# EAGLE board HAP-USB-3.0 (EAGLE 4.16)
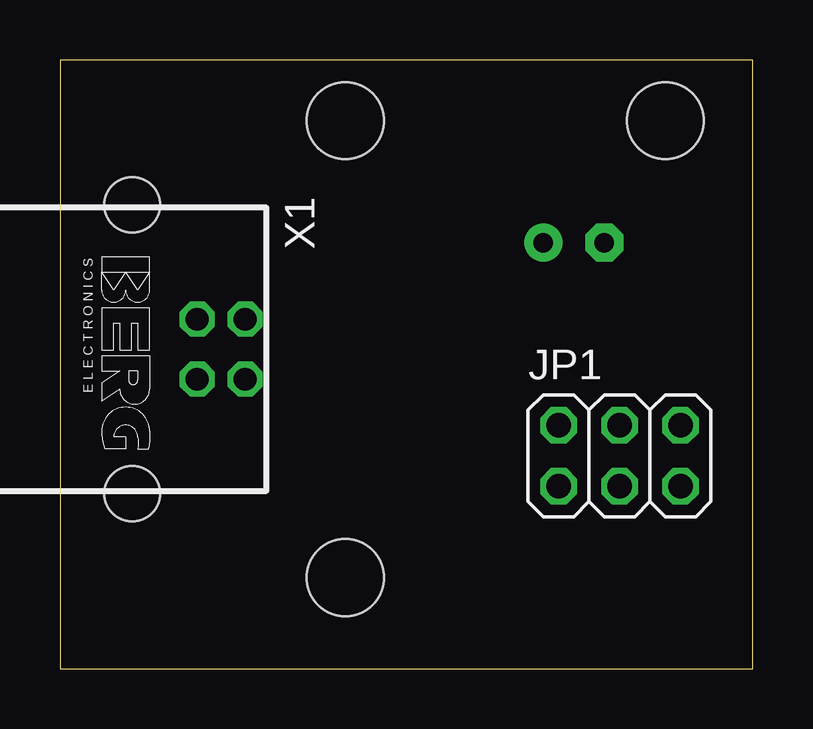
[diagram p0: board, top side]
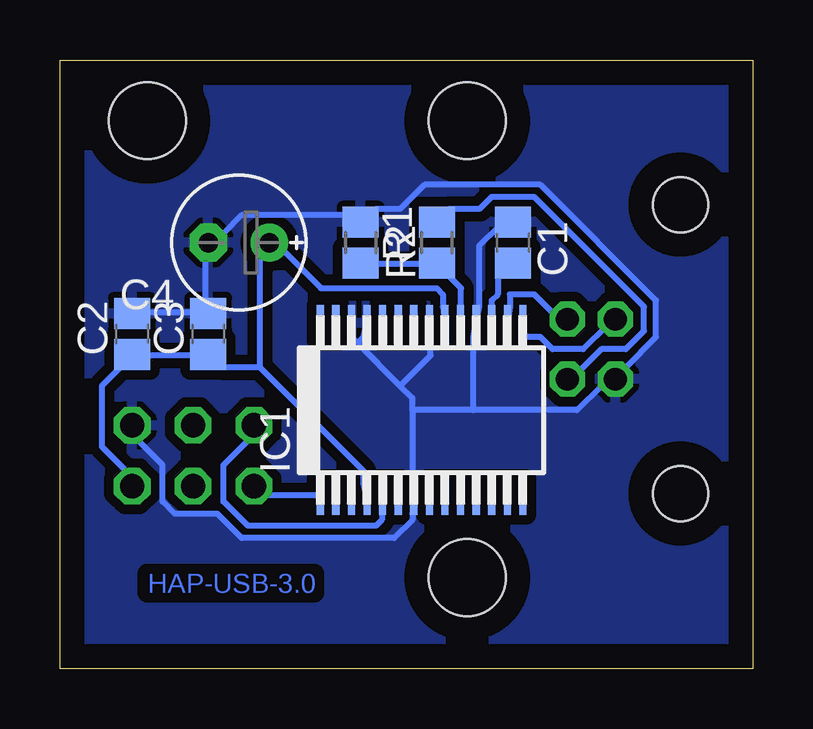
[diagram p1: board, bottom side, seen from below]

Size 28.88 x 25.39 mm. Coordinates in mm from the lower left corner, seen from the top.
Outline: 0,0 28.88,0 28.88,25.39 0,25.39 0,0
Copper layers (1*16): Top 0.035mm / dielectric 1.5mm / Bottom 0.035mm
Design rules "default": minimum track width 10mil, minimum drill 24mil, track to track 8mil, track to pad 8mil, pad to pad 8mil, via to via 8mil, smd to smd 8mil, copper to edge 40mil, drill to drill 8mil, minimum pad ring 10mil, minimum via ring 8mil, stop-mask expansion 4mil, vias tented up to drill 0mil, thermal gap 10mil
Holes 3.2 mm at 11.9,22.85 11.9,3.8 25.23,22.85

## Footprints (pad centres in the part's own frame; a part is rotated, then mirrored left to right if it is on the bottom)
C0805 = smd 1.3 x 1.5: 1 -0.85,0; 2 0.85,0
E2,5-6E = drill 0.813 pad 1.575 round: + -1.27,0 | drill 0.813 pad 1.575 octagon: - 1.27,0
SSOP-28 = smd 0.3 x 1.5: 1 -4.225,-3.625; 2 -3.575,-3.625; 3 -2.925,-3.625; 4 -2.275,-3.625; 5 -1.625,-3.625; 6 -0.975,-3.625; 7 -0.325,-3.625; 8 0.325,-3.625; 9 0.975,-3.625; 10 1.625,-3.625; 11 2.275,-3.625; 12 2.925,-3.625; 13 3.575,-3.625; 14 4.225,-3.625; 15 4.225,3.625; 16 3.575,3.625; 17 2.925,3.625; 18 2.275,3.625; 19 1.625,3.625; 20 0.975,3.625; 21 0.325,3.625; 22 -0.325,3.625; 23 -0.975,3.625; 24 -1.625,3.625; 25 -2.275,3.625; 26 -2.925,3.625; 27 -3.575,3.625; 28 -4.225,3.625
2X03 = drill 1.016 octagon: 1 -2.54,-1.27; 2 -2.54,1.27; 3 0,-1.27; 4 0,1.27; 5 2.54,-1.27; 6 2.54,1.27
R0805 = smd 1.3 x 1.5: 1 -0.85,0; 2 0.85,0
PN61729 = drill 0.95 octagon: 1 1.25,4.71; 2 -1.25,4.71; 3 -1.25,2.71; 4 1.25,2.71 | hole 2.3: -6.02,0; 6.02,0

## Placement (x,y rotation side)
C1  100n  [C0805]  10,17.77 270 bottom
C2  100n  [C0805]  25.87,13.96 90 bottom
C3  100n  [C0805]  22.7,13.96 90 bottom
C4  4µ7  [E2,5-6E]  21.42,17.77 180 bottom
IC1  FT232RL  [SSOP-28]  13.81,10.79 0 bottom
JP1  [2X03]  23.33,8.89 0 top
R1  4k7  [R0805]  13.17,17.77 90 bottom
R2  10k  [R0805]  16.34,17.77 270 bottom
X1  [PN61729]  3.01,13.33 270 top

## Library data of the parts
C1-C4 R1 R2 = rcl
IC1 = ftdi4
JP1 = pinhead
X1 = con-berg

## Nets
GND: C1.1 C2.2 C3.2 C4.- IC1.7 IC1.18 IC1.21 IC1.25 IC1.26 JP1.6 R2.1 X1.4
N$2: C1.2 IC1.17
RESET: IC1.19 R1.1 R2.2
RXD: IC1.5 JP1.2
TXD: IC1.1 JP1.1
USBDM: IC1.16 X1.2
USBDP: IC1.15 X1.3
USBP1: R1.2 X1.1
VCC: C2.1 C3.1 C4.+ IC1.4 IC1.20 JP1.5

## Tracks (layer width: path | path; a pad name or v marks a point on that pad's centre or on a via)
GND
  Bottom 0.254: C2.2 25.36,14.85 23.33,14.85 C3.2 22.82,15.36 22.82,17.14 C4.- 22.06,18.16 21.3,18.92 16.98,18.92 R2.1 15.71,19.17 14.69,19.17 13.68,20.19 8.85,20.19 4.03,15.36 4.03,13.84 5.3,12.57 X1.4 6.31,11.81 7.33,10.79 11.65,10.79 | C1.1 10.63,18.41 11.39,17.65 11.39,15.11 IC1.18 11.65,13.84 11.65,10.79 | 14.19,10.79 14.19,11.3 14.69,11.81 | 14.19,10.79 14.19,7.74 IC1.7 14.19,6.47 14.19,6.22 14.95,5.46 21.3,5.46 22.31,6.47 24.09,6.47 24.6,6.98 24.6,8.5 25.62,9.52 JP1.6 | 16.47,13.58 16.73,13.84 IC1.26 | 14.69,11.81 16.47,13.58 | 14.69,11.81 13.42,13.08 13.42,13.84 IC1.21 | 16.47,13.58 16.22,13.84 IC1.25 | 11.65,10.79 14.19,10.79
  pour Bottom (isolate 0.406): -0.17,25.4 29.04,25.4 29.04,0 -0.17,0
N$2
  Bottom 0.254: C1.2 10.63,16.38 10.63,15.62 10.88,15.36 10.88,15.11 IC1.17
RESET
  Bottom 0.254: IC1.19 12.15,15.11 12.15,15.87 12.66,16.38 R1.1 13.68,16.89 15.71,16.89 R2.2
RXD
  Bottom 0.254: IC1.5 15.46,6.47 15.46,6.22 15.71,5.96 21.04,5.96 22.06,6.98 22.06,8.5 21.04,9.52 JP1.2
TXD
  Bottom 0.254: IC1.1 18,7.23 20.28,7.23 JP1.1
USBDM
  Bottom 0.254: IC1.16 10.12,15.11 10.12,15.62 9.11,15.62 8.34,14.85 X1.2
USBDP
  Bottom 0.254: IC1.15 9.61,13.84 8.85,13.84 8.34,13.33 7.07,13.33 6.06,14.35 X1.3
USBP1
  Bottom 0.254: R1.2 12.66,19.17 11.39,19.17 10.88,19.68 9.11,19.68 4.53,15.11 4.53,14.09 5.3,13.33 6.31,13.33 7.33,12.31 X1.1
VCC
  Bottom 0.254: IC1.20 12.92,15.11 12.92,15.62 13.17,15.87 18,15.87 19.52,17.39 C4.+ 20.54,17.14 20.54,12.57 | 20.54,12.57 16.22,8.25 16.22,7.74 IC1.4 | 20.54,12.57 22.06,12.57 C3.1 23.33,13.08 25.36,13.08 C2.1 26.38,12.57 27.14,11.81 27.14,9.27 26.12,8.25 JP1.5

## Text on the board
Bottom: HAP-USB-3.0